# Altium PCB PCB1.pcbdoc
Units mil, origin at the board's own origin, x right, y up, seen from the top; angles counter-clockwise.
Board outline 1760 x 1060 mil, 2 copper layers (Top Layer, Bottom Layer), stack 62.2 mil thick; 49 components, 32 nets, 136 pads, 24 vias.
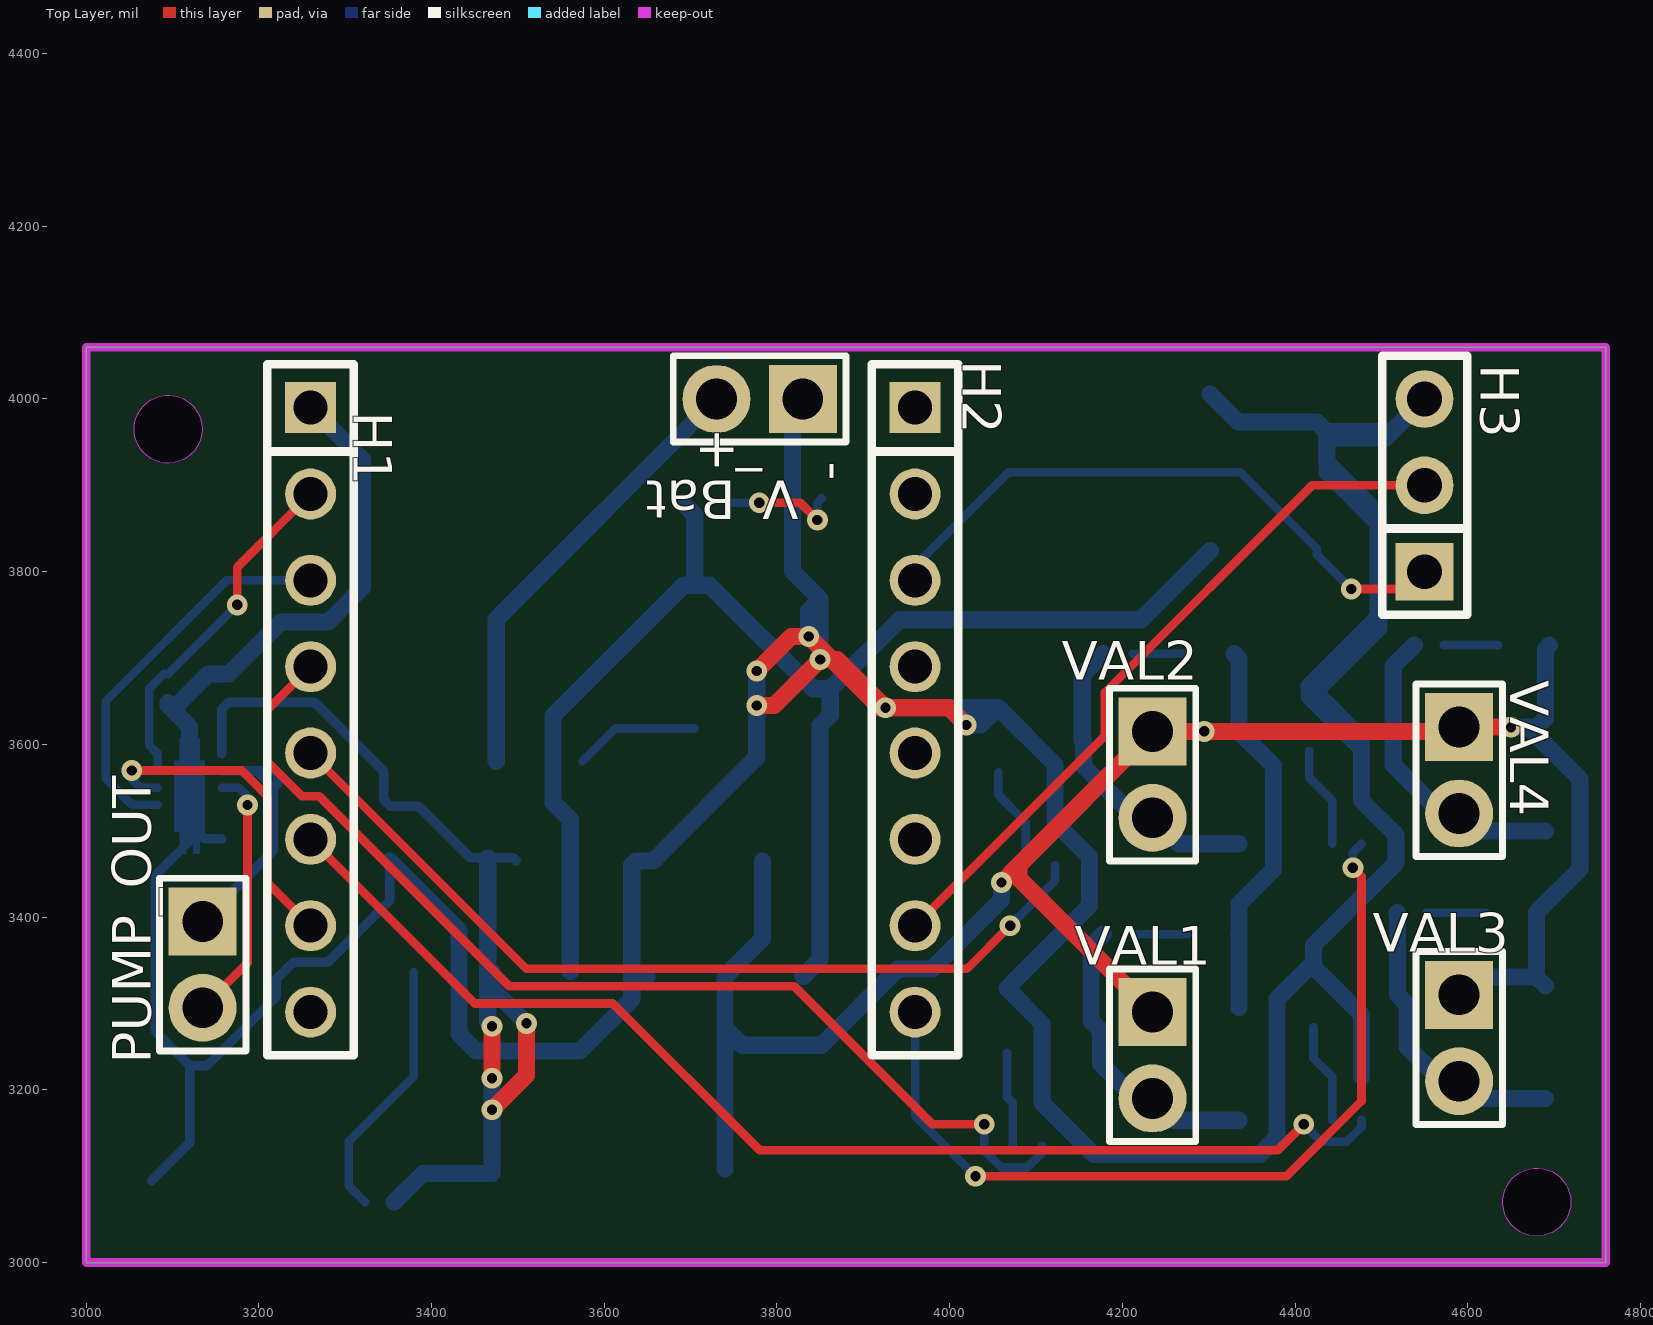
[diagram p0: Top Layer view]
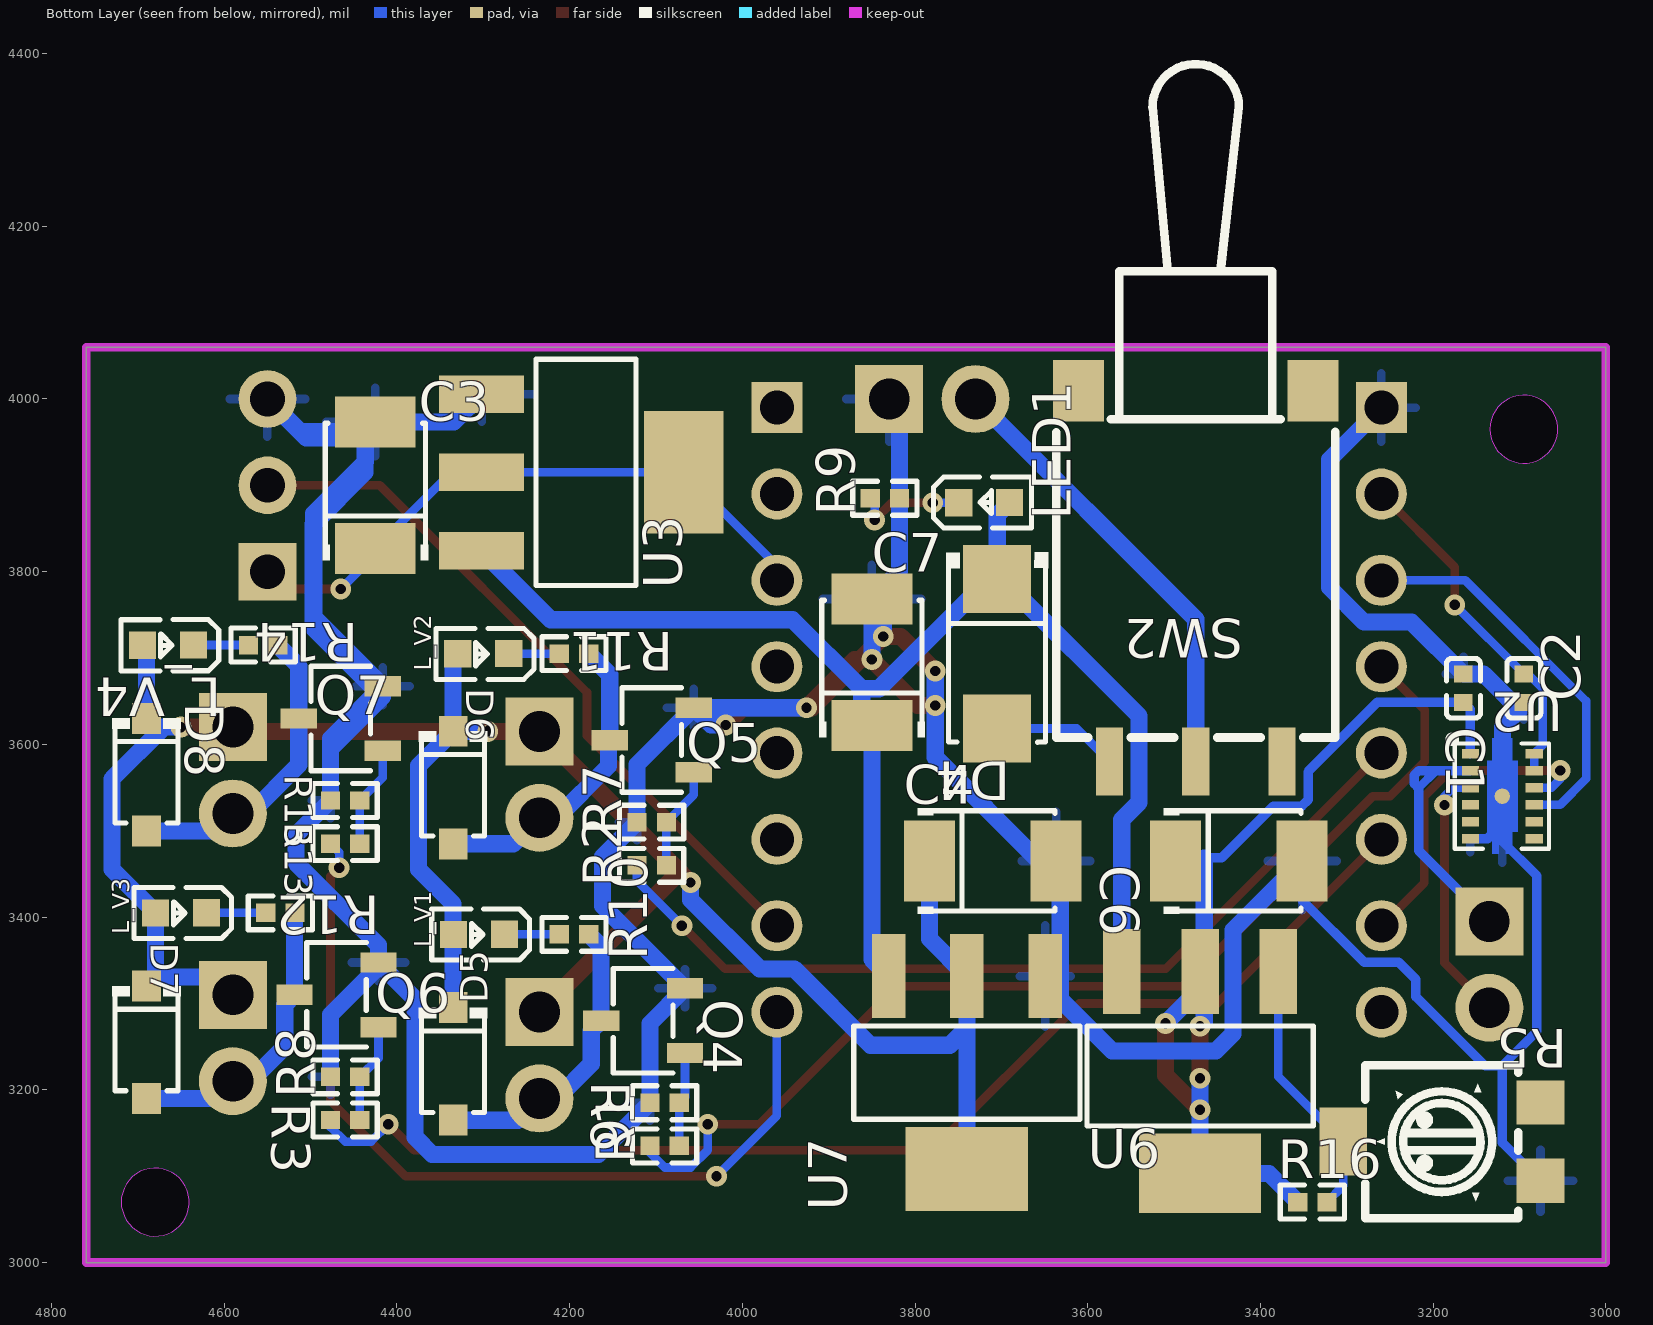
[diagram p1: Bottom Layer view, seen from below]

## Layer stack, top to bottom
Top Solder Mask Layer: solder mask 0.4, Dk 3.3
Top Layer: signal copper 1.4
Dielectric1: surface 59.4, FR4, Dk 4.5
Bottom Layer: signal copper 1.4
Bottom Solder Mask Layer: solder mask 0.4, Dk 3.3

## Board outline
3000,4060 3000,3000 4760,3000 4760,4060
cut-out: 3134.4,3965 3134,3959.5 3132.8,3954.1 3131,3949 3128.4,3944.1 3125.2,3939.7 3121.3,3935.7 3117,3932.4 3112.3,3929.6 3107.2,3927.6 3101.8,3926.2 3096.4,3925.7 3090.9,3925.8 3085.5,3926.8 3080.3,3928.5 3075.3,3930.9 3070.8,3934 3066.7,3937.7 3063.1,3941.9 3060.2,3946.5 3058,3951.5 3056.5,3956.8 3055.7,3962.3 3055.7,3967.7 3056.5,3973.2 3058,3978.5 3060.2,3983.5 3063.1,3988.1 3066.7,3992.3 3070.8,3996 3075.3,3999.1 3080.3,4001.5 3085.5,4003.2 3090.9,4004.2 3096.4,4004.3 3101.8,4003.8 3107.2,4002.4 3112.3,4000.4 3117,3997.6 3121.3,3994.3 3125.2,3990.3 3128.4,3985.9 3131,3981 3132.8,3975.9 3134,3970.5
cut-out: 4719.4,3070 4719,3064.5 4717.8,3059.1 4716,3054 4713.4,3049.1 4710.2,3044.7 4706.3,3040.7 4702,3037.4 4697.3,3034.6 4692.2,3032.6 4686.8,3031.2 4681.4,3030.7 4675.9,3030.8 4670.5,3031.8 4665.3,3033.5 4660.3,3035.9 4655.8,3039 4651.7,3042.7 4648.1,3046.9 4645.2,3051.5 4643,3056.5 4641.5,3061.8 4640.7,3067.3 4640.7,3072.7 4641.5,3078.2 4643,3083.5 4645.2,3088.5 4648.1,3093.1 4651.7,3097.3 4655.8,3101 4660.3,3104.1 4665.3,3106.5 4670.5,3108.2 4675.9,3109.2 4681.4,3109.3 4686.8,3108.8 4692.2,3107.4 4697.3,3105.4 4702,3102.6 4706.3,3099.3 4710.2,3095.3 4713.4,3090.9 4716,3086 4717.8,3080.9 4719,3075.5

## Design rules (kind name [scope] priority, off if disabled: settings)
BoardOutlineClearance copperThickness1oz [All] p0: genericclearance=10 ignorepadtopadclearanceinfootprint=FALSE except(0: Arc-SplitContinuation Track-SplitContinuation SMDPad-SplitContinuation THPad-SplitContinuation Via-SplitContinuation Fill-SplitContinuation Poly-SplitContinuation Region-SplitContinuation Text-SplitContinuation)
BoardOutlineClearance copperThickness2oz [All] p0: genericclearance=10 ignorepadtopadclearanceinfootprint=FALSE except(0: Arc-SplitContinuation Track-SplitContinuation SMDPad-SplitContinuation THPad-SplitContinuation Via-SplitContinuation Fill-SplitContinuation Poly-SplitContinuation Region-SplitContinuation Text-SplitContinuation)
BoardOutlineClearance Plane_innerPlane [All] p0: genericclearance=10 ignorepadtopadclearanceinfootprint=FALSE except(0: Arc-SplitContinuation Track-SplitContinuation SMDPad-SplitContinuation THPad-SplitContinuation Via-SplitContinuation Fill-SplitContinuation Poly-SplitContinuation Region-SplitContinuation Text-SplitContinuation)
BoardOutlineClearance Copper_copperRegion [All] p0: genericclearance=10 ignorepadtopadclearanceinfootprint=FALSE except(0: Arc-SplitContinuation Track-SplitContinuation SMDPad-SplitContinuation THPad-SplitContinuation Via-SplitContinuation Fill-SplitContinuation Poly-SplitContinuation Region-SplitContinuation Text-SplitContinuation)
BoardOutlineClearance otherClearance [All] p0: genericclearance=10 ignorepadtopadclearanceinfootprint=FALSE except(0: Arc-SplitContinuation Track-SplitContinuation SMDPad-SplitContinuation THPad-SplitContinuation Via-SplitContinuation Fill-SplitContinuation Poly-SplitContinuation Region-SplitContinuation Text-SplitContinuation)
Clearance copperThickness1oz [All] p1: gap=7 ignorepadtopadclearanceinfootprint=FALSE
Clearance copperThickness2oz [All] p1: gap=7 ignorepadtopadclearanceinfootprint=FALSE
Clearance Plane_innerPlane [All] p1: gap=7 ignorepadtopadclearanceinfootprint=FALSE
Clearance Copper_copperRegion [All] p1: gap=7 ignorepadtopadclearanceinfootprint=FALSE
Clearance otherClearance [All] p1: gap=7 ignorepadtopadclearanceinfootprint=FALSE
DiffPairsRouting differentialPair [All] p1: maxuncoupledlength=10 minlimit=6 maxlimit=Infinity mostfreqgap=6 toplayer_minwidth=5 toplayer_prefwidth=10 toplayer_maxwidth=100 bottomlayer_minwidth=5 bottomlayer_prefwidth=10 bottomlayer_maxwidth=100
PasteMaskExpansion pasteMaskExpansion [All] p1: expansion=0
PlaneConnect innerPlane [All] p1: planeconnectstyle=Relief reliefexpansion=20 reliefentries=4 reliefconductorwidth=10 reliefairgap=10
PolygonConnect copperRegion [All] p1: connectstyle=Relief reliefentries=4 reliefconductorwidth=10 polygonreliefangle="90 Angle" airgapwidth=10
RoutingVias viaSize [All] p1: viastyle="Through Hole" holewidth=12.0078 minholewidth=11.811 maxholewidth=248.0314 width=12.0078 minwidth=11.811 maxwidth=248.0314
SolderMaskExpansion solderMaskExpansion [IsVia] p1: useseparateexpansions=TRUE expansion=-1000 expansionbottom=-1000
SolderMaskExpansion solderMaskExpansion [All] p2: useseparateexpansions=TRUE expansion=2 expansionbottom=2
Width copperThickness1oz [All] p1: maxlimit=100 minlimit=5 preferedwidth=10
Width copperThickness2oz [All] p1: maxlimit=100 minlimit=20 preferedwidth=20

## Components (designator, comment, footprint, x,y, rotation, side; value= is the part's Value field where it differs from the comment)
C1 "100nF" C0402 3165,3665 r270 bottom
C2 "100nF" C0402 3095,3665 r90 bottom
C3 "220uF" CASE-B_3528#1 4425,3900 r90 bottom
C4 "220uF" CASE-B_3528#2 3710,3465 r180 bottom
C6 "220uF" CASE-B_3528#2 3425,3465 r180 bottom
C7 "220uF" CASE-B_3528#1 3850,3695 r90 bottom
D4 "SS24" SMA_L4.3-W2.6-LS5.1-RD 3705,3705 r270 bottom
D5 "1N5817W" SOD-123_L2.7-W1.7-LS3.8-RD 4335,3230 r270 bottom
D6 "1N5817W" SOD-123_L2.7-W1.7-LS3.8-RD 4335,3550 r270 bottom
D7 "1N5817W" SOD-123_L2.7-W1.7-LS3.8-RD 4690,3255 r270 bottom
D8 "1N5817W" SOD-123_L2.7-W1.7-LS3.8-RD 4690,3565 r270 bottom
H1 "PZ254V-11-08P" HDR-TH_8P-P2.54-V-M 3260,3640 r270 top
H2 "PZ254V-11-08P" HDR-TH_8P-P2.54-V-M 3960,3640 r270 top
H3 "PZ254V-11-03P" HDR-TH_3P-P2.54-V-M_PZ254V-11-03P 4550,3900 r90 top
L_V1 "XL-1608SURC-06" LED0603-RD_RED 4305,3380 r0 bottom
L_V2 "XL-1608SURC-06" LED0603-RD_RED 4300,3705 r0 bottom
L_V3 "XL-1608SURC-06" LED0603-RD_RED 4650,3405 r0 bottom
L_V4 "XL-1608SURC-06" LED0603-RD_RED 4665,3715 r0 bottom
LED1 "XL-1608SURC-06" LED0603-RD_RED 3720,3880 r180 bottom
PUMP_OUT "PZ254V-11-02P" HDR-TH_2P-P2.54-V-M 3135,3345 r270 top
Q4 "AO3400" SOT-23-3_L2.9-W1.6-P1.90-LS2.8-BR 4115,3280 r180 bottom
Q5 "AO3400" SOT-23-3_L2.9-W1.6-P1.90-LS2.8-BR 4105,3605 r180 bottom
Q6 "AO3400" SOT-23-3_L2.9-W1.6-P1.90-LS2.8-BR 4470,3310 r180 bottom
Q7 "AO3400" SOT-23-3_L2.9-W1.6-P1.90-LS2.8-BR 4465,3630 r180 bottom
R1 "100Ω" R0402 4090,3135 r180 bottom
R2 "100Ω" R0402 4105,3460 r180 bottom
R3 "100Ω" R0402 4460,3165 r180 bottom
R5 "500Ω" RES-ADJ-SMD_3314G-1-103E 3190,3140 r90 bottom
R6 "10kΩ" R0402 4090,3185 r180 bottom
R7 "10kΩ" R0402 4105,3510 r180 bottom
R8 "10kΩ" R0402 4460,3215 r180 bottom
R9 "220Ω" R0402 3835,3885 r0 bottom
R10 "220Ω" R0402 4195,3380 r0 bottom
R11 "220Ω" R0402 4195,3705 r0 bottom
R12 "220Ω" R0402 4535,3405 r0 bottom
R13 "100Ω" R0402 4460,3485 r180 bottom
R14 "220Ω" R0402 4555,3715 r0 bottom
R15 "10kΩ" R0402 4460,3535 r180 bottom
R16 "120Ω" R0402 3340,3070 r180 bottom
SW2 "2BS3T1A1MZQES" SW-SMD_2BS3T1A1MZQES 3475,3795 r0 bottom
U2 "DRV8835DSSR" WSON-12_L3.0-W2.0-P0.50-BL-EP 3120,3540 r270 bottom
U3 "LM1117S-5.0" SOT-223-3_L6.5-W3.4-P2.30-LS7.0-BR 4185,3915 r0 bottom
U6 "LM1117S-ADJ" SOT-223-3_L6.5-W3.4-P2.30-LS7.0-BR 3470,3220 r90 bottom
U7 "LDL1117S33R" SOT-223-4_L6.5-W3.5-P2.30-LS7.0-BR 3740,3220 r90 bottom
V_Bat "PZ254V-11-02P" HDR-TH_2P-P2.54-V-M 3780,4000 r180 top
VAL1 "PZ254V-11-02P" HDR-TH_2P-P2.54-V-M 4235,3240 r270 top
VAL2 "PZ254V-11-02P" HDR-TH_2P-P2.54-V-M 4235,3565 r270 top
VAL3 "PZ254V-11-02P" HDR-TH_2P-P2.54-V-M 4590,3260 r270 top
VAL4 "PZ254V-11-02P" HDR-TH_2P-P2.54-V-M 4590,3570 r270 top

## Footprints (in the part's own frame and the unit in brackets; to place one, negate y for a bottom-side part, rotate by r counter-clockwise, add the part's x,y. Pads: shape width x height; smd on the part's side, far side on the other; paste and mask are expansions set on the pad)
C0402 [mil]
  rect 19.7x21.3 smd: 1(-16.5,0) 2(16.5,0)
  silkscreen extent -34,-20 34,20
CASE-B_3528#1 [mil]
  rect 59.3x93.5 smd: 1(-73.2,0) 2(73.3,0)
  silkscreen extent -87,-61 72,61
CASE-B_3528#2 [mil]
  rect 59.3x93.5 smd: 1(-73.3,0) 2(73.2,0)
  silkscreen extent -87,-61 72,61
HDR-TH_2P-P2.54-V-M [mil]
  rect 78.7x78.7 hole 47.2: 1(-50,0)
  round 78.7 hole 47.2: 2(50,0)
  silkscreen extent -100,-50 100,50
HDR-TH_3P-P2.54-V-M_PZ254V-11-03P [mil]
  rect 66.9x66.9 hole 40.2: 1(-100,0)
  round 66.9 hole 40.2: 2(0,0) 3(100,0)
  silkscreen extent -150,-49 150,49
HDR-TH_8P-P2.54-V-M [mil]
  rect 59.1x59.1 hole 39.4: 1(-350,0)
  round 59.1 hole 39.4: 2(-250,0) 3(-150,0) 4(-50,0) 5(50,0) 6(150,0) 7(250,0) 8(350,0)
  silkscreen extent -400,-50 400,50
LED0603-RD_RED [mil]
  rect 31.5x31.5 smd: 1(-29.5,-0.1) 2(29.5,0.1)
  silkscreen extent -59,-29 55,30
R0402 [mil]
  rect 22.3x21.3 smd paste-3937 mask+2: 1(-17,0) 2(17,0)
  silkscreen extent -37,-20 37,20
RES-ADJ-SMD_3314G-1-103E [mil]
  rect 51.2x55.1 smd: 1(45.3,-114.2) 3(-45.3,-114.2)
  rect 78.7x55.1 smd: 2(0,114.2)
  silkscreen extent -89,-89 89,89
SMA_L4.3-W2.6-LS5.1-RD [mil]
  rect 78.7x78.7 smd: 1(-86.6,0) 2(86.6,0)
  silkscreen extent -117,-59 103,59
SOD-123_L2.7-W1.7-LS3.8-RD [mil]
  rect 35.8x33.1 smd: 1(-65.2,0) 2(65.2,0)
  silkscreen extent -65,-39 56,40
SOT-23-3_L2.9-W1.6-P1.90-LS2.8-BR [mil]
  rect 42.1x23.6 smd: 1(48.6,-37.4) 2(48.6,37.4) 3(-48.6,0)
  silkscreen extent -35,-61 35,61
SOT-223-3_L6.5-W3.4-P2.30-LS7.0-BR [mil]
  rect 98.4x43.3 smd: 1(116.9,-90.6) 2(116.9,0) 3(116.9,90.6)
  rect 92.1x141.7 smd: 4(-116.9,0)
  silkscreen extent -62,-131 54,131
SOT-223-4_L6.5-W3.5-P2.30-LS7.0-BR [mil]
  rect 97.2x38.6 smd: 1(111.6,-90.6) 2(111.6,0) 3(111.6,90.6)
  rect 97.2x141.7 smd: 4(-111.6,0)
  silkscreen extent -54,-131 54,131
SW-SMD_2BS3T1A1MZQES [mil]
  rect 31.5x78.7 smd: 1(100,214.6) 2(0,214.6) 3(-100,214.6)
  rect 59.1x70.9 smd: 4(-135.8,-214.6) 5(135.8,-214.6)
  silkscreen extent -161,-593 161,187
WSON-12_L3.0-W2.0-P0.50-BL-EP [mil]
  rect 11x19.7 smd: 1(-49.2,-37) 2(-29.5,-37) 3(-9.8,-37) 4(9.8,-37) 5(29.5,-37) 6(49.2,-37) 7(49.2,37) 8(29.5,37) 9(9.8,37) 10(-9.8,37) 11(-29.5,37) 12(-49.2,37)
  round 17.7 smd: 13(0,0)
  Top Layer region: -41.3,17.7 -41.3,11.8 -66.9,11.8 -66.9,3.9 -41.3,3.9 -41.3,-3.9 -66.9,-3.9 -66.9,-11.8 -41.3,-11.8 -41.3,-17.7 41.3,-17.7 41.3,-11.8 66.9,-11.8 66.9,-3.9 41.3,-3.9 41.3,3.9 66.9,3.9 66.9,11.8 41.3,11.8 41.3,17.7
  silkscreen extent -69,-61 61,54

## Via types
v1: diameter 24, hole 12, Top Layer to Bottom Layer, 24 vias

## Nets (pads, with @x,y where several pads share a name; then routed paths per layer and width w, separated by ;. In a path a pad name is that pad's centre, name@x,y a point inside that pad or via, vN(x,y) a via of type N, cw(c..) or ccw(c..) an arc to the next point about the centre after c; other vN are vias at no path point)
$1N8207: Q5.1 R2.2 R7.2 | length 120.7
  Bottom Layer w10: Q5.1 4056.4,3541.6 R7.2 R2.2
$1N8209: Q4.1 R1.2 R6.2 | length 110.3
  Bottom Layer w10: Q4.1 4066.4,3191.6 R6.2 R1.2
$1N8337: Q6.1 R3.2 R8.2 | length 116.5
  Bottom Layer w10: Q6.1 4421.4,3236.6 R8.2 R3.2
$1N8652: LED1.1 R9.2 | length 132.9
  Top Layer w10: v1(3779.5,3879.9) 3826.9,3879.9 v1(3846.9,3859.9)
  Bottom Layer w10: LED1.1 v1(3779.5,3879.9) ; v1(3846.9,3859.9) 3846.9,3879.9 R9.2
$1N9553: L_V1.1 R10.2 | length 63.3
  Bottom Layer w10: R10.2@4212.2,3380.1 L_V1.1
$1N9636: L_V2.1 R11.2 | length 58.3
  Bottom Layer w10: R11.2@4212.2,3705.1 L_V2.1
$1N9642: L_V3.1 R12.2 | length 68.3
  Bottom Layer w10: R12.2@4552.2,3405.1 L_V3.1
$1N10283: R5.2 R16.2 U6.1 | length 305.8
  Bottom Layer w10: R16.2 3304.2,3088.8 R5.2 3379.4,3215.3 U6.1
$1N15824: Q7.1 R13.2 R15.2 | length 118.6
  Bottom Layer w10: Q7.1 4416.4,3561.6 R15.2 R13.2
$1N15826: L_V4.1 R14.2 | length 63.3
  Bottom Layer w10: R14.2@4572.2,3715.1 L_V4.1
$1N16217: SW2.2 V_Bat.2 | length 525.2
  Bottom Layer w20: SW2.2 3475,3745 V_Bat.2
$1N16229: D4.2 SW2.1 | length 145.8
  Bottom Layer w10: SW2.1 3612.9,3618.4 D4.2
+3.3V: C2.2 H1.2 U2.11 U2.12 | length 404.9
  Top Layer w10: v1(3175,3761.5) 3175,3805 H1.2
  Bottom Layer w10: U2.11 U2.12 3073,3599.2 3073,3664.4 3090.2,3681.5 C2.2 v1(3175,3761.5)
+5V: C3.1 H2.3 H3.1 U3.2 U3.4 | length 719.9
  Top Layer w10: v1(4465,3780) 4530,3780 H3.1
  Bottom Layer w10: H2.3 3960,3806.9 U3.4 U3.2 4336.8,3915 C3.1 4425,3820 v1(4465,3780)
+V_MOTOR: C1.2 C6.1 R16.1 U2.1 U6.2 U6.4 | length 1185.5
  Top Layer w20: v1(3470,3176.9) 3510,3216.9 v1(3510,3276.9) ; v1(3470,3213.5) v1(3470,3273.5)
  Bottom Layer w11: U2.1 3157,3640.5 C1.2 3265,3648.5 3345,3568.5 3345,3535.8 3352.3,3528.5 3385,3528.5 3445,3468.5 3465,3468.5 3494.8,3468.5 C6.1
  Bottom Layer w20: R16.1 3390.1,3103.1 U6.4 v1(3470,3176.9) v1(3470,3213.5) ; 3465,3468.5 U6.2@3465,3341.9 ; v1(3470,3273.5) 3465,3278.5 U6.2@3465,3341.9 ; v1(3510,3276.9) 3470,3316.9 U6.2 U6.2@3465,3341.9
+V_VALVE: C4.1 D5.1 D6.1 D7.1 D8.1 L_V1.2 L_V2.2 L_V3.2 L_V4.2 U7.2 U7.4 VAL1.1 VAL2.1 VAL3.1 VAL4.1 | length 2755.9
  Top Layer w20: v1(4060,3440) 4080,3460 ; VAL1.1 4080,3445 4080,3460 ; v1(4650,3620) VAL4.1 4585,3615 v1(4295,3615) VAL2.1 4080,3460
  Bottom Layer w20: U7.4 3740,3271.6 ; C4.1 3783.3,3374.9 U7.2 3740,3271.6 ; v1(4060,3440) 4060,3420 3980,3340 3940,3340 3851.6,3251.6 3760,3251.6 3740,3271.6 ; v1(4295,3615) D6.1 ; L_V2.2 4335,3699.4 D6.1 ; L_V1.2 L_V1.2@4335,3379.4 ; D5.1 L_V1.2@4335,3379.4 ; VAL3.1 4610.7,3330.7 D7.1@4679.5,3330.7 ; v1(4650,3620) 4670,3620 ; D7.1 D7.1@4679.5,3330.7 ; L_V4.2 4690,3710.4 D8.1 4679.8,3620 4670,3620 ; L_V1.2@4335,3379.4 4335,3415.2 4375,3455.2 4375,3575.2 D6.1 ; 4670,3620 4730,3560 4730,3455.4 L_V3.2 D7.1@4679.5,3330.7
A1_1: H1.7 U2.10 | length 384.2
  Top Layer w10: v1(3053,3569.8) 3180.2,3569.8 3210.2,3539.8 3210.2,3439.8 H1.7
  Bottom Layer w10: v1(3053,3569.8) 3053,3559.8 3063,3549.8 U2.10
A1_2: H1.3 U2.9 | length 457.2
  Bottom Layer w10: U2.9 3053,3530.2 3023,3560.2 3023,3650.2 3163,3790.2 H1.3@3259.8,3790.2
GND: C1.1 C2.1 C3.2 C4.2 C6.2 C7.2 H1.1 H3.3 Q4.2 Q5.2 Q6.2 Q7.2 R5.3 R6.1 R7.1 R8.1 R9.1 R15.1 U2.6 U2.13 U3.1 U7.1 V_Bat.1 | length 6330.6
  Top Layer w20: v1(3776.8,3645) 3796.8,3645 v1(3850,3698.3) 3863.5,3698.3 ; v1(3776.8,3685) 3816.8,3725 v1(3836.8,3725) 3863.5,3698.3 ; v1(4019.3,3622.4) 3999.3,3642.4 v1(3925.8,3642.4) ; 3863.5,3698.3 3870,3698.3 v1(3925.8,3642.4) ; 3863.5,3698.3 3919.3,3642.4 v1(3925.8,3642.4)
  Bottom Layer w11: R5.3 3120,3138.9 3120,3227.8 ; U2.13 3120,3507.8 ; U2.6 3137,3490.8 3120,3507.8 ; C6.2 3351.8,3419.5 3280,3347.8 3240,3347.8 3220,3327.8 3220,3307.8 3140,3227.8 3120,3227.8 ; 3120,3227.8 3080,3267.8 3080,3447.8 3120,3487.8 3120,3507.8
  Bottom Layer w19.7: C2.1 3095,3645 C2.1@3100,3640 ; U2.13 3120,3620 C2.1@3100,3640 ; H1.1 3320,3930 3320,3781.5 3280,3741.5 3225,3741.5 C1.1 3141.5,3681.5 C2.1@3100,3640
  Bottom Layer w20: C6.2 3431.8,3385 3431.8,3265 3451.8,3245 3571.8,3245 3631.8,3305 U7.1@3631.8,3325 ; U7.1 3642.8,3325 U7.1@3631.8,3325 ; v1(3776.8,3685) v1(3776.8,3645) 3776.8,3585 3656.8,3465 C4.2 3631.8,3460 U7.1@3631.8,3325 ; V_Bat.1 3818,3988 R9.1 3818,3800.3 C7.2 ; v1(3836.8,3725) 3836.8,3755 C7.2 ; v1(3850,3698.3) C7.2 ; v1(3925.8,3642.4) Q5.2 ; v1(4019.3,3622.4) 4036.4,3622.4 Q5.2 ; U3.1 4334.2,3973.3 C3.2 C3.2@4436.4,3961.9 ; R8.1 4477,3286.9 Q6.2@4419,3345 ; H3.3 4511.9,3961.9 ; Q5.2 4122,3576.7 R7.1 4162,3470 4162,3413.1 Q4.2 4107,3276.7 R6.1 4167,3125 4359,3125 4379,3145 4379,3305 Q6.2@4419,3345 ; 4417,3655 4477,3595 ; 4417,3655 Q7.2@4417,3666.7 ; 4417,3655 Q7.2@4422.9,3660.9 ; Q7.2@4417,3666.7 Q7.2@4422.9,3660.9 ; Q7.2@4417,3666.7 Q7.2 4496.4,3747.4 4496.4,3855.7 ; Q6.2@4419,3345 Q6.2 4421.4,3367.4 4517,3463.1 4517,3495 R15.1 4477,3595 ; Q7.2@4422.9,3660.9 4477,3606.7 4477,3595 ; Q7.2@4422.9,3660.9 4497,3735 4497,3855 4496.4,3855.7 ; C3.2@4436.4,3961.9 4436.4,3927.4 4437,3926.7 ; C3.2@4436.4,3961.9 4511.9,3961.9 ; C3.2@4436.4,3961.9 4437,3961.2 C3.2@4437,3955 ; 4437,3926.7 4496.4,3867.4 4496.4,3855.7 ; 4437,3926.7 4437,3915 4496.4,3855.7 ; 4437,3926.7 C3.2@4437,3955 ; C3.2@4437,3955 4505,3955 4511.9,3961.9
LED_STRIP: H2.7 H3.2 | length 830.5
  Top Layer w10: H2.7 4180,3610 4180,3660 4420,3900 H3.2
MODE: H1.8
PUM1: PUMP_OUT.1 U2.2 | length 300.9
  Bottom Layer w10: 3197,3569.5 3217,3549.5
  Bottom Layer w11: PUMP_OUT.1 3217,3477 3217,3549.5 3222,3554.5 3222,3564.5 3217,3569.5 3197,3569.5 U2.2
PUM2: PUMP_OUT.2 U2.3 | length 300.5
  Top Layer w10: PUMP_OUT.2 3187,3347 v1(3187,3529.8)
  Bottom Layer w10: U2.3 3177,3549.8 3187,3539.8 v1(3187,3529.8)
VAL1: D5.2 Q4.3 R10.1 VAL1.2 | length 347.7
  Bottom Layer w20: R10.1 4163.6,3365.7 Q4.3 4175,3268.6 4175,3230 4215,3190 VAL1.2 4260.2,3164.8 D5.2
VAL2: D6.2 Q5.3 R11.1 VAL2.2 | length 358.1
  Bottom Layer w20: R11.1 4153.6,3680.7 Q5.3 4155,3603.6 4155,3575 4215,3515 VAL2.2 4265.2,3484.8 D6.2
VAL3: D7.2 Q6.3 R12.1 VAL3.2 | length 344.9
  Bottom Layer w20: R12.1 4518.6,3404.3 Q6.3 4530,3298.6 4530,3250 4570,3210 VAL3.2 4610.2,3189.8 D7.2
VAL4: D8.2 Q7.3 R14.1 VAL4.2 | length 356.9
  Bottom Layer w20: R14.1 4513.6,3690.7 Q7.3 4513.6,3576.4 4570,3520 VAL4.2 4610.2,3499.8 D8.2
VAL_E1: H1.4 R1.1 | length 1255
  Top Layer w10: H1.4 3210,3640 3210,3580 3250,3540 3270,3540 3490,3320 3820,3320 3980,3160 v1(4040,3160)
  Bottom Layer w10: v1(4040,3160) 4040,3130 4060,3110 4090,3110 4107,3127 R1.1
VAL_E2: H1.5 R2.1 | length 1025.8
  Top Layer w10: H1.5 3510,3340 4020,3340 v1(4070,3390)
  Bottom Layer w10: v1(4070,3390) 4122,3442 R2.1
VAL_E3: H1.6 R3.1 | length 1401.9
  Top Layer w10: H1.6 3450,3300 3610,3300 3780,3130 4380,3130 v1(4410,3160)
  Bottom Layer w10: v1(4410,3160) 4430,3140 4460,3140 4477,3157 R3.1
VAL_E4: H2.8 R13.1 | length 1008.3
  Top Layer w10: v1(4030,3100) 4390,3100 4477,3187 4477,3447 v1(4467,3457)
  Bottom Layer w10: H2.8 3960,3170 v1(4030,3100) ; v1(4467,3457) 4467,3475 R13.1
VCC: C7.1 D4.1 LED1.2 U3.3 U6.3 U7.3 | length 1694.7
  Bottom Layer w20: U6.3 3560.6,3512.8 3540.6,3532.8 3540.6,3632.8 3692.2,3784.4 D4.1@3712.2,3784.4 ; LED1.2 3705,3865.6 D4.1 D4.1@3712.2,3784.4 ; U7.3 3850,3351.1 C7.1 3861.9,3633.7 3861.9,3664.4 ; U3.3 4221.9,3744.4 3941.9,3744.4 3861.9,3664.4 ; D4.1@3712.2,3784.4 3721.9,3784.4 3841.9,3664.4 3861.9,3664.4
pads on no net: H2.1 H2.2 H2.4 H2.5 H2.6 R5.1 SW2.3 SW2.4 SW2.5 U2.4 U2.5 U2.7 U2.8

## Polygon pours and split planes (outlines as drawn)
GND on Bottom Layer (solid, remove dead copper, pour order 0): 3020,4045 3020,3020 4740,3020 4740,4045

## Keep-outs
Board Outline Layer:
  region: 3134.4,3965 3134,3959.5 3132.8,3954.1 3131,3949 3128.4,3944.1 3125.2,3939.7 3121.3,3935.7 3117,3932.4 3112.3,3929.6 3107.2,3927.6 3101.8,3926.2 3096.4,3925.7 3090.9,3925.8 3085.5,3926.8 3080.3,3928.5 3075.3,3930.9 3070.8,3934 3066.7,3937.7 3063.1,3941.9 3060.2,3946.5 3058,3951.5 3056.5,3956.8 3055.7,3962.3 3055.7,3967.7 3056.5,3973.2 3058,3978.5 3060.2,3983.5 3063.1,3988.1 3066.7,3992.3 3070.8,3996 3075.3,3999.1 3080.3,4001.5 3085.5,4003.2 3090.9,4004.2 3096.4,4004.3 3101.8,4003.8 3107.2,4002.4 3112.3,4000.4 3117,3997.6 3121.3,3994.3 3125.2,3990.3 3128.4,3985.9 3131,3981 3132.8,3975.9 3134,3970.5
  region: 3134.4,3965 3134,3959.5 3132.8,3954.1 3131,3949 3128.4,3944.1 3125.2,3939.7 3121.3,3935.7 3117,3932.4 3112.3,3929.6 3107.2,3927.6 3101.8,3926.2 3096.4,3925.7 3090.9,3925.8 3085.5,3926.8 3080.3,3928.5 3075.3,3930.9 3070.8,3934 3066.7,3937.7 3063.1,3941.9 3060.2,3946.5 3058,3951.5 3056.5,3956.8 3055.7,3962.3 3055.7,3967.7 3056.5,3973.2 3058,3978.5 3060.2,3983.5 3063.1,3988.1 3066.7,3992.3 3070.8,3996 3075.3,3999.1 3080.3,4001.5 3085.5,4003.2 3090.9,4004.2 3096.4,4004.3 3101.8,4003.8 3107.2,4002.4 3112.3,4000.4 3117,3997.6 3121.3,3994.3 3125.2,3990.3 3128.4,3985.9 3131,3981 3132.8,3975.9 3134,3970.5
  region: 4719.4,3070 4719,3064.5 4717.8,3059.1 4716,3054 4713.4,3049.1 4710.2,3044.7 4706.3,3040.7 4702,3037.4 4697.3,3034.6 4692.2,3032.6 4686.8,3031.2 4681.4,3030.7 4675.9,3030.8 4670.5,3031.8 4665.3,3033.5 4660.3,3035.9 4655.8,3039 4651.7,3042.7 4648.1,3046.9 4645.2,3051.5 4643,3056.5 4641.5,3061.8 4640.7,3067.3 4640.7,3072.7 4641.5,3078.2 4643,3083.5 4645.2,3088.5 4648.1,3093.1 4651.7,3097.3 4655.8,3101 4660.3,3104.1 4665.3,3106.5 4670.5,3108.2 4675.9,3109.2 4681.4,3109.3 4686.8,3108.8 4692.2,3107.4 4697.3,3105.4 4702,3102.6 4706.3,3099.3 4710.2,3095.3 4713.4,3090.9 4716,3086 4717.8,3080.9 4719,3075.5
  region: 4719.4,3070 4719,3064.5 4717.8,3059.1 4716,3054 4713.4,3049.1 4710.2,3044.7 4706.3,3040.7 4702,3037.4 4697.3,3034.6 4692.2,3032.6 4686.8,3031.2 4681.4,3030.7 4675.9,3030.8 4670.5,3031.8 4665.3,3033.5 4660.3,3035.9 4655.8,3039 4651.7,3042.7 4648.1,3046.9 4645.2,3051.5 4643,3056.5 4641.5,3061.8 4640.7,3067.3 4640.7,3072.7 4641.5,3078.2 4643,3083.5 4645.2,3088.5 4648.1,3093.1 4651.7,3097.3 4655.8,3101 4660.3,3104.1 4665.3,3106.5 4670.5,3108.2 4675.9,3109.2 4681.4,3109.3 4686.8,3108.8 4692.2,3107.4 4697.3,3105.4 4702,3102.6 4706.3,3099.3 4710.2,3095.3 4713.4,3090.9 4716,3086 4717.8,3080.9 4719,3075.5
  lines w0.1: 3055.7,3962.3 3056.5,3956.8 3058,3951.5 3060.2,3946.5 3063.1,3941.9 3066.7,3937.7 3070.8,3934 3075.3,3930.9 3080.3,3928.5 3085.5,3926.8 3090.9,3925.8 3096.4,3925.7 3101.8,3926.2 3107.2,3927.6 3112.3,3929.6 3117,3932.4 3121.3,3935.7 3125.2,3939.7 3128.4,3944.1 3131,3949 3132.8,3954.1 3134,3959.5 3134.4,3965 3134,3970.5 3132.8,3975.9 3131,3981 3128.4,3985.9 3125.2,3990.3 3121.3,3994.3 3117,3997.6 3112.3,4000.4 3107.2,4002.4 3101.8,4003.8 3096.4,4004.3 3090.9,4004.2 3085.5,4003.2 3080.3,4001.5 3075.3,3999.1 3070.8,3996 3066.7,3992.3 3063.1,3988.1 3060.2,3983.5 3058,3978.5 3056.5,3973.2 3055.7,3967.7 3055.7,3962.3 ; 4640.7,3067.3 4641.5,3061.8 4643,3056.5 4645.2,3051.5 4648.1,3046.9 4651.7,3042.7 4655.8,3039 4660.3,3035.9 4665.3,3033.5 4670.5,3031.8 4675.9,3030.8 4681.4,3030.7 4686.8,3031.2 4692.2,3032.6 4697.3,3034.6 4702,3037.4 4706.3,3040.7 4710.2,3044.7 4713.4,3049.1 4716,3054 4717.8,3059.1 4719,3064.5 4719.4,3070 4719,3075.5 4717.8,3080.9 4716,3086 4713.4,3090.9 4710.2,3095.3 4706.3,3099.3 4702,3102.6 4697.3,3105.4 4692.2,3107.4 4686.8,3108.8 4681.4,3109.3 4675.9,3109.2 4670.5,3108.2 4665.3,3106.5 4660.3,3104.1 4655.8,3101 4651.7,3097.3 4648.1,3093.1 4645.2,3088.5 4643,3083.5 4641.5,3078.2 4640.7,3072.7 4640.7,3067.3
  lines w10: 3000,3000 3000,4060 4760,4060 4760,3000 3000,3000

## Silkscreen, mask and mechanical layers (free items; w line width, h text height)
Top Silkscreen Layer:
  text "+" at 3750,3915 h45 r90
  text "-" at 3880,3905 h45 r90
Mechanical Layer:
  lines w0.1: 3055.7,3962.3 3056.5,3956.8 3058,3951.5 3060.2,3946.5 3063.1,3941.9 3066.7,3937.7 3070.8,3934 3075.3,3930.9 3080.3,3928.5 3085.5,3926.8 3090.9,3925.8 3096.4,3925.7 3101.8,3926.2 3107.2,3927.6 3112.3,3929.6 3117,3932.4 3121.3,3935.7 3125.2,3939.7 3128.4,3944.1 3131,3949 3132.8,3954.1 3134,3959.5 3134.4,3965 3134,3970.5 3132.8,3975.9 3131,3981 3128.4,3985.9 3125.2,3990.3 3121.3,3994.3 3117,3997.6 3112.3,4000.4 3107.2,4002.4 3101.8,4003.8 3096.4,4004.3 3090.9,4004.2 3085.5,4003.2 3080.3,4001.5 3075.3,3999.1 3070.8,3996 3066.7,3992.3 3063.1,3988.1 3060.2,3983.5 3058,3978.5 3056.5,3973.2 3055.7,3967.7 3055.7,3962.3 ; 4640.7,3067.3 4641.5,3061.8 4643,3056.5 4645.2,3051.5 4648.1,3046.9 4651.7,3042.7 4655.8,3039 4660.3,3035.9 4665.3,3033.5 4670.5,3031.8 4675.9,3030.8 4681.4,3030.7 4686.8,3031.2 4692.2,3032.6 4697.3,3034.6 4702,3037.4 4706.3,3040.7 4710.2,3044.7 4713.4,3049.1 4716,3054 4717.8,3059.1 4719,3064.5 4719.4,3070 4719,3075.5 4717.8,3080.9 4716,3086 4713.4,3090.9 4710.2,3095.3 4706.3,3099.3 4702,3102.6 4697.3,3105.4 4692.2,3107.4 4686.8,3108.8 4681.4,3109.3 4675.9,3109.2 4670.5,3108.2 4665.3,3106.5 4660.3,3104.1 4655.8,3101 4651.7,3097.3 4648.1,3093.1 4645.2,3088.5 4643,3083.5 4641.5,3078.2 4640.7,3072.7 4640.7,3067.3